# Altium PCB PCB1.PcbDoc
Units mil, origin at the board's own origin, x right, y up, seen from the top; angles counter-clockwise.
Board outline 6000 x 4000 mil, 2 copper layers (Top Layer, Bottom Layer); 25 components, 6 nets, 57 pads, 1 vias.
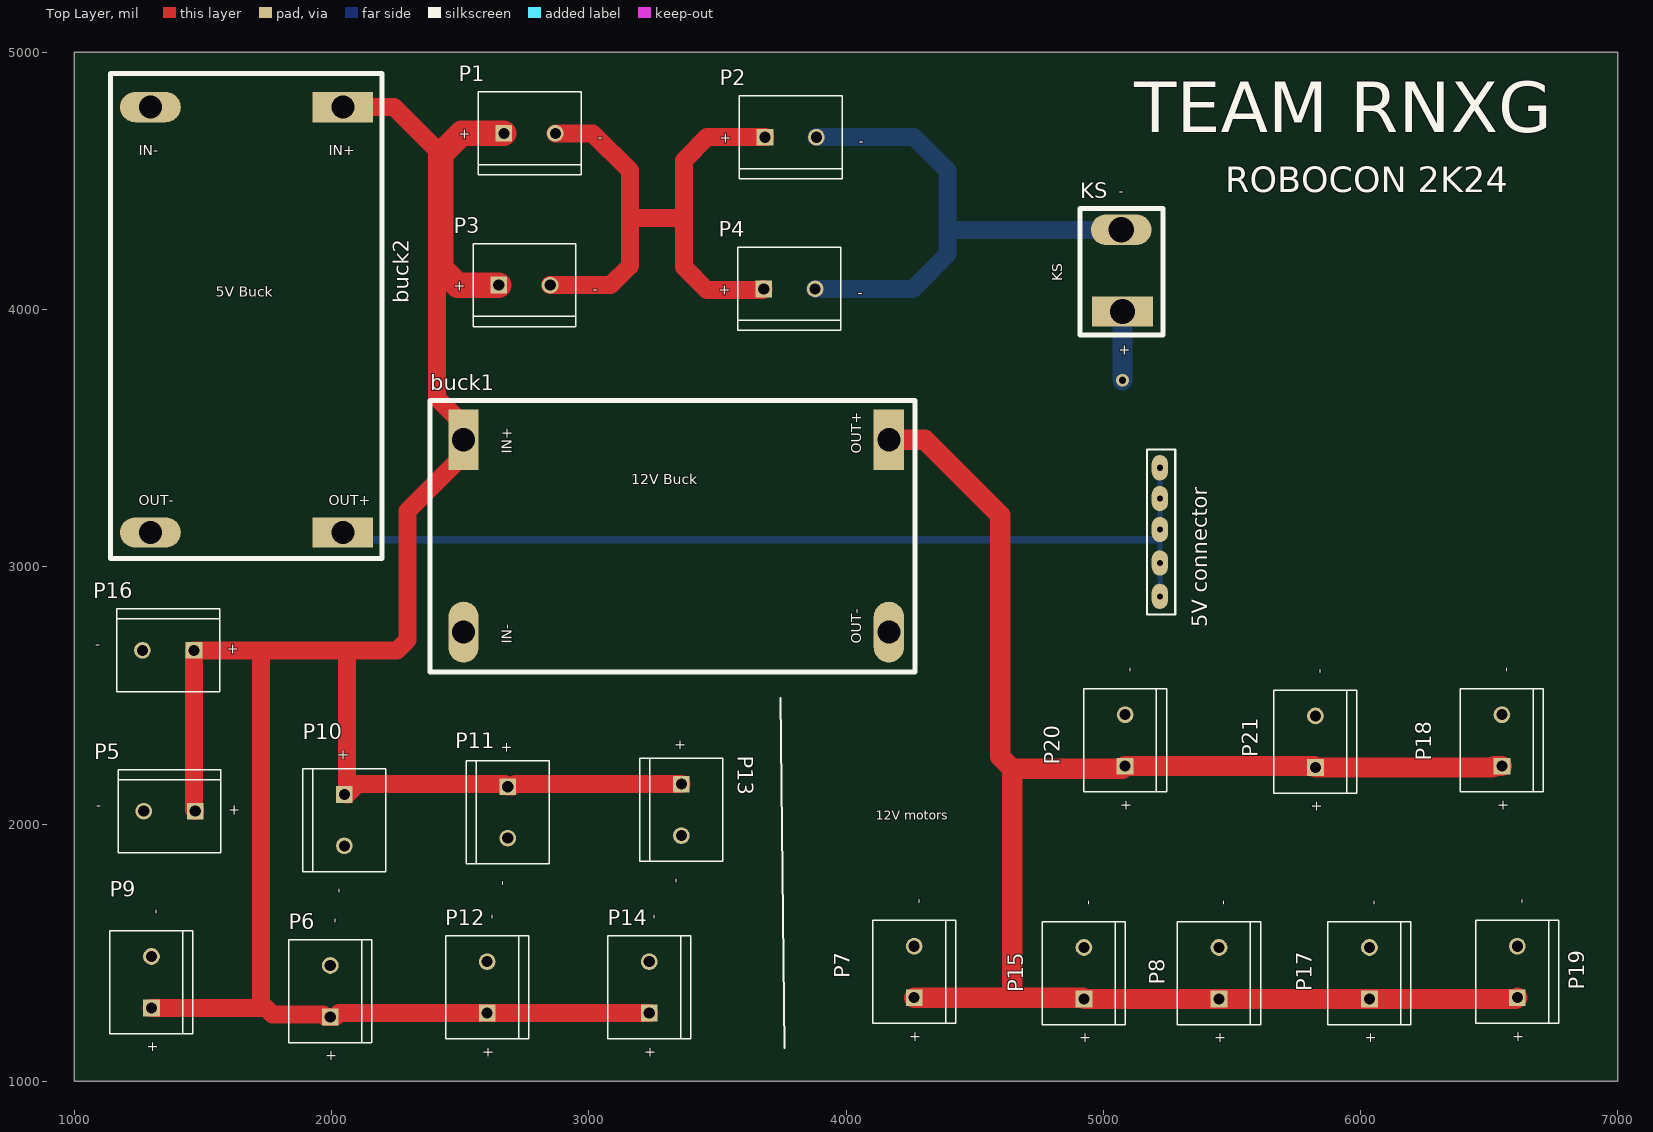
[diagram p0: Top Layer view]
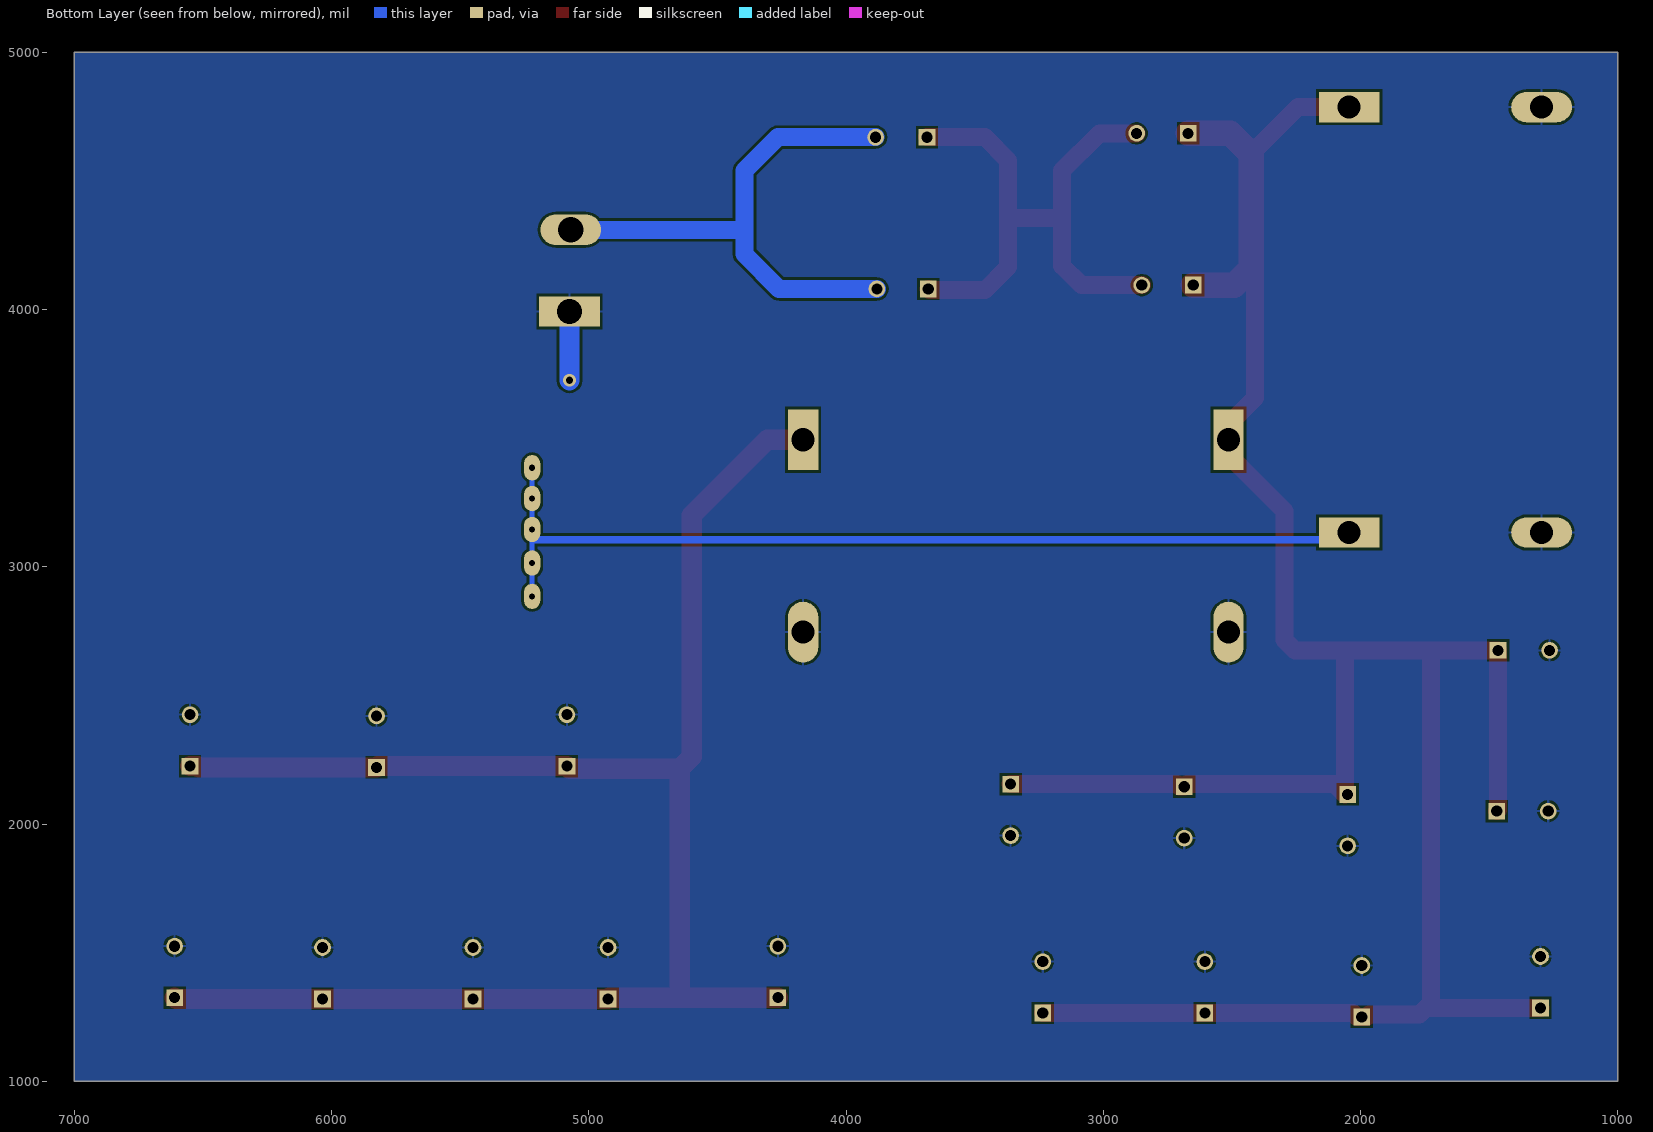
[diagram p1: Bottom Layer view, seen from below]
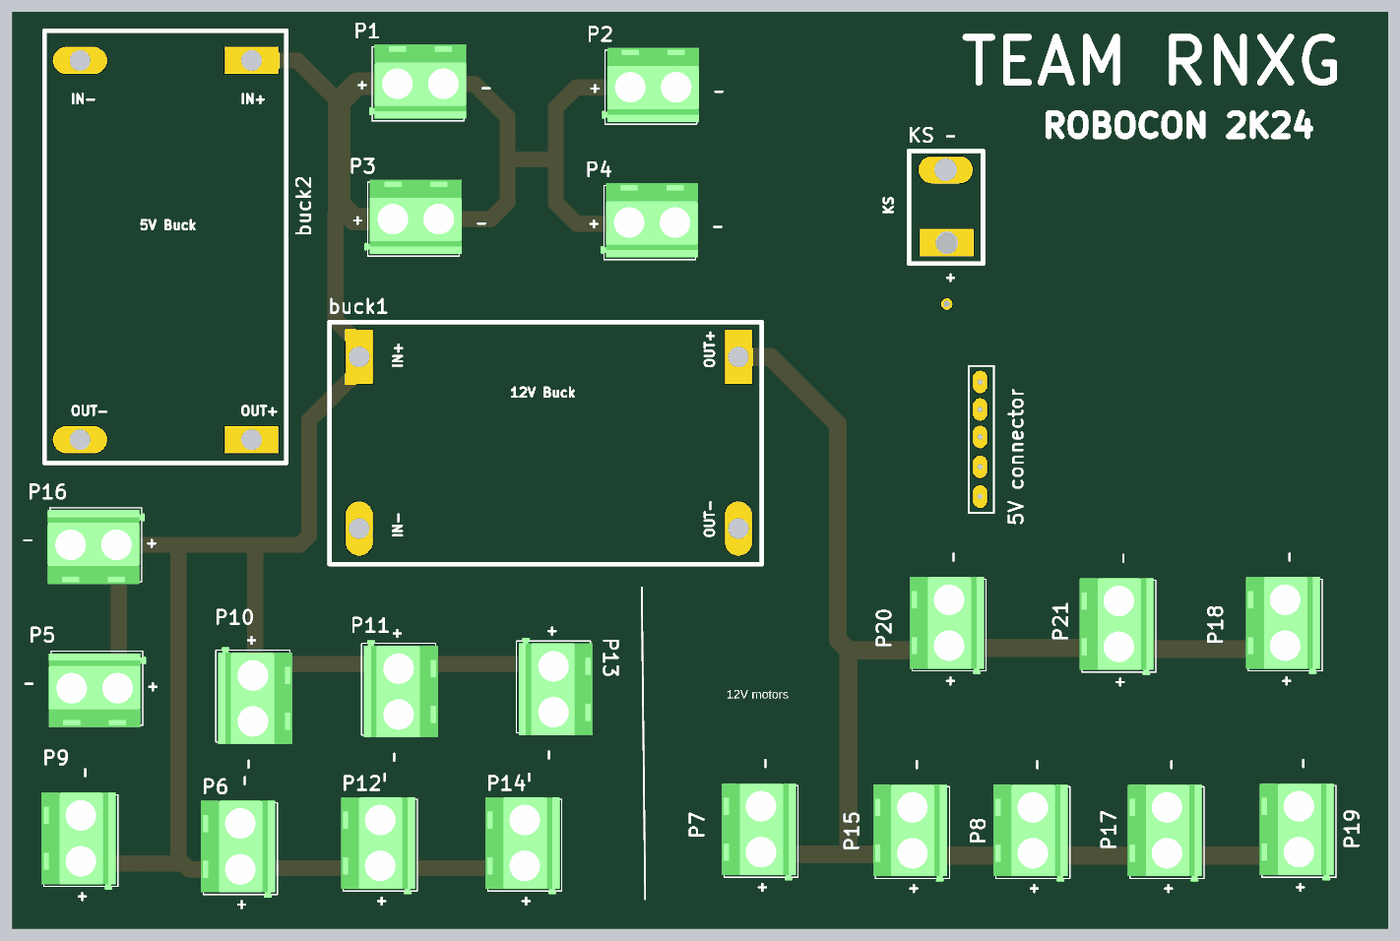
[diagram p2: 3D render of the assembled board from above, using the file's embedded part models]

## Layer stack, top to bottom
Top Solder: solder mask 0.4, Solder Resist, Dk 3.5
Top Layer: signal copper 1.4
Dielectric 1: dielectric 12.6, FR-4, Dk 4.8
Bottom Layer: signal copper 1.4
Bottom Solder: solder mask 0.4, Solder Resist, Dk 3.5

## Board outline
1000,1000 7000,1000 7000,5000 1000,5000

## Design rules (kind name [scope] priority, off if disabled: settings)
Clearance [All] p1: gap=10 ignorepadtopadclearanceinfootprint=FALSE
HoleSize [All] p1: absolutevalues=TRUE maxlimit=103 minlimit=10 maxpercent=80.000 minpercent=20.000
MinimumSolderMaskSliver [All] p1: minsoldermaskwidth=2
PolygonConnect [All] p1: connectstyle=Relief reliefconductorwidth=10 reliefentries=4 polygonreliefangle="90 Angle" airgapwidth=10
RoutingVias [All] p1: holewidth=28 width=50 viastyle="Through Hole" minholewidth=28 minwidth=50 maxholewidth=28 maxwidth=50
SolderMaskExpansion [All] p1: expansion=4 istentingtop=FALSE
Width [All] p1: maxlimit=98.43 minlimit=10 preferedwidth=78.74 minimp=50.000000 maximp=50.000000 favimp=50.000000
28 further rules are at their usual default settings.

## Components (designator, comment, footprint, x,y, rotation, side; value= is the part's Value field where it differs from the comment)
"5V connector" "1X2 Header" CONNECTOR 5220,2885 r90 top
buck1 "Component_1" "BUCK - DUPLICATE" 3340,3120 r90 top
buck2 "Component_1" "BUCK - DUPLICATE" 1670,3960 r0 top
KS "KS" KS 5070,4150 r0 top
P1 "282837-2" TE_282837-2 2770,4685 r0 top
P2 "282837-2" TE_282837-2 3785,4670 r0 top
P3 "282837-2" TE_282837-2 2750,4095 r0 top
P4 "282837-2" TE_282837-2 3780,4080 r0 top
P5 "282837-2" TE_282837-2 1370,2050 r180 top
P6 "282837-2" TE_282837-2 1995,1350 r90 top
P7 "282837-2" TE_282837-2 4265,1425 r90 top
P8 "282837-2" TE_282837-2 5450,1420 r90 top
P9 "282837-2" TE_282837-2 1300,1385 r90 top
P10 "282837-2" TE_282837-2 2050,2015 r270 top
P11 "282837-2" TE_282837-2 2685,2045 r270 top
P12 "282837-2" TE_282837-2 2605,1365 r90 top
P13 "282837-2" TE_282837-2 3360,2055 r270 top
P14 "282837-2" TE_282837-2 3235,1365 r90 top
P15 "282837-2" TE_282837-2 4925,1420 r90 top
P16 "282837-2" TE_282837-2 1365,2675 r180 top
P17 "282837-2" TE_282837-2 6035,1420 r90 top
P18 "282837-2" TE_282837-2 6550,2325 r90 top
P19 "282837-2" TE_282837-2 6610,1425 r90 top
P20 "282837-2" TE_282837-2 5085,2325 r90 top
P21 "282837-2" TE_282837-2 5825,2320 r90 top

## Footprints (in the part's own frame and the unit in brackets; to place one, negate y for a bottom-side part, rotate by r counter-clockwise, add the part's x,y. Pads: shape width x height; smd on the part's side, far side on the other; paste and mask are expansions set on the pad)
"BUCK - DUPLICATE" [mm]
  oval 6x3 hole 2.286: 1(-9.5,21) 3(-9.5,-21)
  rect 6x3 hole 2.286: 2(9.5,21) 4(9.5,-21)
  silkscreen extent -13.44,-23.58 13.36,24.3
CONNECTOR [mm]
  oval 2.5x1.6 hole 0.6: 1(0,0) 2(3.302,0) 3(6.604,0) 4(9.652,0) 5(12.7,0)
  silkscreen extent -1.78,-1.52 14.48,1.27
KS [mm]
  rect 6x3 hole 2.5: 1(0.127,-4)
  oval 6x3 hole 2.5: 2(0,4.064)
  silkscreen extent -4.06,-6.33 4.13,6.16
TE_282837-2 [mm]
  rect 1.65x1.65 / inner round 1.65 / far side rect 1.65x1.65 hole 1.1: 1(-2.54,0)
  round 1.65 hole 1.1: 2(2.54,0)
  silkscreen extent -5.08,-4.1 5.08,4.1, body extent -5.43,-3.85 5.33,4.35, height 10

## Part data
"5V connector": library part 640456-4, "Board Connector, 4 Contact(s), 1 Row(s), Male, Straight, 0.1 inch Pitch, Solder Terminal, Friction Lock, Natural Insulator", Flammability Rating="UL94 V-0", Insulation Color=Natural, Manufacturer="TE Connectivity", Max Operating Temperature=105°C, Min Operating Temperature=-55°C, Supplier Part Number=90F5641, Additional Feature=POLARIZED, Body Breadth=0.225inch, Body Depth=0.31inch, Body Length=0.4inch, Body/Shell Style=PLUG, Category=Connectors, ComponentLink1Description=https://www.te.com:443/usa-en/product-640456-4.datasheet.pdf?src-supplier=IHS+Markit, ComponentLink1URL=https://www.te.com:443/usa-en/product-640456-4.datasheet.pdf?src-supplier=IHS+Markit, ComponentLink2Description=https://datasheet.ciiva.com/36859/38054-36859312.pdf?src-supplier=Farnell, ComponentLink2URL=https://datasheet.ciiva.com/36859/38054-36859312.pdf?src-supplier=Farnell, ComponentLink3Description=https://datasheet.ciiva.com/25618/0900766b80eb7fdd-25618242.pdf?src-supplier=Rs, ComponentLink3URL=https://datasheet.ciiva.com/25618/0900766b80eb7fdd-25618242.pdf?src-supplier=Rs, ComponentLink4Description=https://datasheet.ciiva.com/16286/eng-ds-82056-mta-0608-16286228.pdf?src-supplier=Future+Electronics, ComponentLink4URL=https://datasheet.ciiva.com/16286/eng-ds-82056-mta-0608-16286228.pdf?src-supplier=Future+Electronics, ComponentLink5Description=https://datasheet.ciiva.com/11746/0900766b80027008-11746331.pdf?src-supplier=Rs, ComponentLink5URL=https://datasheet.ciiva.com/11746/0900766b80027008-11746331.pdf?src-supplier=Rs, ComponentLink6Description=https://datasheet.ciiva.com/19462/613958-19462402.pdf?src-supplier=Jameco, ComponentLink6URL=https://datasheet.ciiva.com/19462/613958-19462402.pdf?src-supplier=Jameco, ComponentLink7Description=https://datasheet.ciiva.com/14637/70083644-14637814.pdf?src-supplier=Allied+Electronics, ComponentLink7URL=https://datasheet.ciiva.com/14637/70083644-14637814.pdf?src-supplier=Allied+Electronics, ComponentLink8Description=https://datasheet.ciiva.com/709/eng-cd-640456-w2-709689.pdf?src-supplier=Digikey, ComponentLink8URL=https://datasheet.ciiva.com/709/eng-cd-640456-w2-709689.pdf?src-supplier=Digikey, ComponentLink9Description=https://datasheet.ciiva.com/14156/mta-cst-100-sl-156-eng-datasheet-14156822.pdf?src-supplier=Distrelec, ComponentLink9URL=https://datasheet.ciiva.com/14156/mta-cst-100-sl-156-eng-datasheet-14156822.pdf?src-supplier=Distrelec, ComponentLink10Description=https://datasheet.ciiva.com/16656/eng-ds-82056-mta-0608-16656524.pdf?, ComponentLink10URL=https://datasheet.ciiva.com/16656/eng-ds-82056-mta-0608-16656524.pdf?, Connector Type="BOARD CONNECTOR", Contact Finish - Mating="NOT SPECIFIED", Contact Finish - Termination="Tin (Sn)", Contact Gender=Male, Contact Pattern=RECTANGULAR, Contact Style="SQ PIN-SKT", DIN Conformance=No, Filter Feature=No, IEC Conformance=No, Insulation Material=Polyester, JESD-609 Code=e3, Manufacturer Part Number=640456-4, Mating Contact Pitch=0.1inch, Mating Information="MULTIPLE MATING PARTS AVAILABLE", MIL Conformance=No, Mixed Contacts=No, Mounting Option 1=LOCKING, Mounting Option 2="FRICTION LOCK", Mounting Style=STRAIGHT, Mounting Technology=Board, Number Of Connectors=1, Number of Contacts=4, Number Of PCB Rows=1, Number of Rows Loaded=1, Option="General Purpose", PCB Contact Pattern=RECTANGULAR, Polarization Key="POLARIZED HOUSING", Pricing="1=0.234, 10=0.193, 25=0.183, 100=0.173, 500=0.155 (USD)", Reach SVHC Compliant=Yes, Reference Standard=UL, Reliability=COMMERCIAL, RoHS Compliant=Yes, Stock=46164, Supplier=Avnet, Terminal Length=0.14inch, Terminal Pitch=2.54mm, Termination=Solder
P1 P2 P3 P4 P5 P6 P7 P8 P9 P10 P11 P12 P13 P14 P15 P16 P17 P18 P19 P20 P21: "Ð Ð°Ð·ÑŠÐµÐ¼Ð½Ñ‹Ðµ ÐºÐ»ÐµÐ¼Ð¼Ð½Ñ‹Ðµ ÐºÐ¾Ð»Ð¾Ð´ÐºÐ¸ Ð Ð¾Ð·ÐµÑ‚ÐºÐ° 2 Ð¿Ð¾Ð»Ð¾Ð¶ÐµÐ½Ð¸Ñ 5,08 Ð¼Ð¼ ÐŸÑ€Ð¸Ð¿Ð¾Ð¹ Ð¿Ñ€ÑÐ¼Ð¾Ð¹ Ñ‡ÐµÑ€ÐµÐ· Ð¾Ñ‚Ð²ÐµÑ€ÑÑ‚Ð¸Ðµ 13,5 Ð / ÐºÐ¾Ð½Ñ‚Ð°ÐºÑ‚", Package=None, Availability="In Stock", Check_prices=https://www.snapeda.com/parts/282837-2/TE+Connectivity+AMP+Connectors/view-part/?ref=eda, MF="TE Connectivity", MP=282837-2, Price=None, Purchase-URL=https://pricing.snapeda.com/search/part/282837-2/?ref=eda, SnapEDA_Link=https://www.snapeda.com/parts/282837-2/TE+Connectivity+AMP+Connectors/view-part/?ref=snap

## Via types
v1: diameter 50, hole 28, Top Layer to Bottom Layer, 1 vias

## Nets (pads, with @x,y where several pads share a name; then routed paths per layer and width w, separated by ;. In a path a pad name is that pad's centre, name@x,y a point inside that pad or via, vN(x,y) a via of type N, cw(c..) or ccw(c..) an arc to the next point about the centre after c; other vN are vias at no path point)
5V+: "5V connector.1" "5V connector.2" "5V connector.3" "5V connector.4" "5V connector.5" buck2.4 | length 3637.7
  Bottom Layer w10: buck2.4 buck2.4@2072.24,3105
  Bottom Layer w20: 5220,2885 5220,2995 5220,3105 5220,3225 5220,3335
  Bottom Layer w30: buck2.4@2072.24,3105 5220,3105
12V+: buck1.4 P7.1 P8.1 P15.1 P17.1 P18.1 P19.1 P20.1 P21.1 | length 6711.2
  Top Layer w78.74: buck1.4 4305.98,3494.02 4600,3200 4600,2261.12 4646.12,2215 ; P7.1 4665,1325 ; P15.1@4920,1325 4665,1325 ; P15.1 P8.1 6605,1320 P19.1 ; P18.1 6520,2225 6515,2220 P21.1 5820,2225 P20.1 5075,2215 4646.12,2215 ; 4646.12,2215 4646.12,1343.88 4665,1325
24v: buck1.2 buck2.2 P1.1 P3.1 P5.1 P6.1 P9.1 P10.1 P11.1 P12.1 P13.1 P14.1 P16.1 | length 9721.3
  Top Layer w70: P9.1 1746.01,1285 ; P5.1 1465,2055 P16.1 1725,2675 ; buck2.2 2243.23,4786.77 2425,4605 ; P10.1@2060,2125 2060,2675 ; P10.1@2061.01,2115 2101.01,2155 2675,2155 P11.1 2704.03,2145 2714.03,2155 P13.1 ; 2425,4135 2410,4120 2410,3656.3 2505,3561.3 2505,3495 2505.98,3494.02 buck1.2 2513.23,3434.96 2295,3216.73 2295,2716.01 2253.99,2675 2060,2675 ; P14.1 2029.03,1265 2014.03,1250 1975.97,1250 1965.97,1260 1771.01,1260 1746.01,1285 ; 1725,2675 2060,2675 ; 1725,2675 1725,1306.01 1746.01,1285
  Top Layer w98.42: 2425,4135 2425,4605 2505,4685 P1.1 ; 2425,4160 2490,4095 P3.1
GND: KS.2 P2.2 P4.2 | length 2136.8
  Bottom Layer w70: P4.2 4260,4080 4395,4215 4395,4315 ; P2.2 4265,4670 4395,4540 4395,4315 ; KS.2 4400,4310 4395,4315
NetP1_2: P1.2 P2.1 P3.2 P4.1 | length 2387.8
  Top Layer w70: P3.2 3085,4095 3160,4170 3160,4355 ; P1.2 3015,4685 3160,4540 3160,4355 ; P4.1 3675,4075 3460,4075 3370,4165 3370,4355 ; P2.1 3460,4670 3370,4580 3370,4355 ; 3160,4355 3370,4355
OUT: buck1.1 buck1.3 buck2.1 buck2.3 KS.1 P5.2 P6.2 P7.2 P8.2 P9.2 P10.2 P11.2 P12.2 P13.2 P14.2 P15.2 P16.2 P17.2 P18.2 P19.2 P20.2 P21.2 | length 267.5
  Bottom Layer w78.74: v1(5075,3725) KS.1

## Polygon pours and split planes (outlines as drawn)
OUT on Bottom Layer "OUT_L02_P000" (solid, remove dead copper, pour order 0): 1000,1000 7000,1000 7000,5000 1000,5000

## Silkscreen, mask and mechanical layers (free items; w line width, h text height)
Top Overlay:
  lines w7.87: 3745,2490 3760,1130
  text "TEAM RNXG" at 5120,4690 h196.85
  text "ROBOCON 2K24" at 5475,4455 h100
  text "5V Buck" at 1550,4050 h40
  text "12V Buck" at 3165,3320 h40
  text "12V motors" at 4115,2005 h60

## Text inside footprints (layer, text, board x,y; h text height)
buck1: Top Overlay "OUT-" at 4060,2700 h40 r90; Top Overlay "OUT+" at 4060,3440 h40 r90; Top Overlay "IN-" at 2700,2700 h40 r90; Top Overlay "IN+" at 2700,3440 h40 r90
buck2: Top Overlay "OUT-" at 1250,3240 h40; Top Overlay "OUT+" at 1990,3240 h40; Top Overlay "IN-" at 1250,4600 h40; Top Overlay "IN+" at 1990,4600 h40
KS: Top Overlay "-" at 5060,4440.01 h40; Top Overlay "+" at 5060,3823.34 h40
P1: Top Overlay "-" at 3035,4650.01 h40; Top Overlay "+" at 2495,4663.34 h40
P2: Top Overlay "+" at 3510,4648.34 h40; Top Overlay "-" at 4050,4635.01 h40
P3: Top Overlay "-" at 3015,4060.01 h40; Top Overlay "+" at 2475,4073.34 h40
P4: Top Overlay "+" at 3505,4058.34 h40; Top Overlay "-" at 4045,4045.01 h40
P5: Top Overlay "-" at 1105,2084.99 h40 r180; Top Overlay "+" at 1645,2071.66 h40 r180
P6: Top Overlay "+" at 2016.66,1075 h40 r90; Top Overlay "-" at 2029.99,1615 h40 r90
P7: Top Overlay "-" at 4299.99,1690 h40 r90; Top Overlay "+" at 4286.66,1150 h40 r90
P8: Top Overlay "+" at 5471.66,1145 h40 r90; Top Overlay "-" at 5484.99,1685 h40 r90
P9: Top Overlay "-" at 1334.99,1650 h40 r90; Top Overlay "+" at 1321.66,1110 h40 r90
P10: Top Overlay "+" at 2028.34,2290 h40 r270; Top Overlay "-" at 2015.01,1750 h40 r270
P11: Top Overlay "+" at 2663.34,2320 h40 r270; Top Overlay "-" at 2650.01,1780 h40 r270
P12: Top Overlay "+" at 2626.66,1090 h40 r90; Top Overlay "-" at 2639.99,1630 h40 r90
P13: Top Overlay "-" at 3325.01,1790 h40 r270; Top Overlay "+" at 3338.34,2330 h40 r270
P14: Top Overlay "+" at 3256.66,1090 h40 r90; Top Overlay "-" at 3269.99,1630 h40 r90
P15: Top Overlay "-" at 4959.99,1685 h40 r90; Top Overlay "+" at 4946.66,1145 h40 r90
P16: Top Overlay "+" at 1640,2696.66 h40 r180; Top Overlay "-" at 1100,2709.99 h40 r180
P17: Top Overlay "-" at 6069.99,1685 h40 r90; Top Overlay "+" at 6056.66,1145 h40 r90
P18: Top Overlay "+" at 6571.66,2050 h40 r90; Top Overlay "-" at 6584.99,2590 h40 r90
P19: Top Overlay "-" at 6644.99,1690 h40 r90; Top Overlay "+" at 6631.66,1150 h40 r90
P20: Top Overlay "+" at 5106.66,2050 h40 r90; Top Overlay "-" at 5119.99,2590 h40 r90
P21: Top Overlay "-" at 5859.99,2585 h40 r90; Top Overlay "+" at 5846.66,2045 h40 r90